# Allegro board PCIE TEST BOARD_V1.4.brd
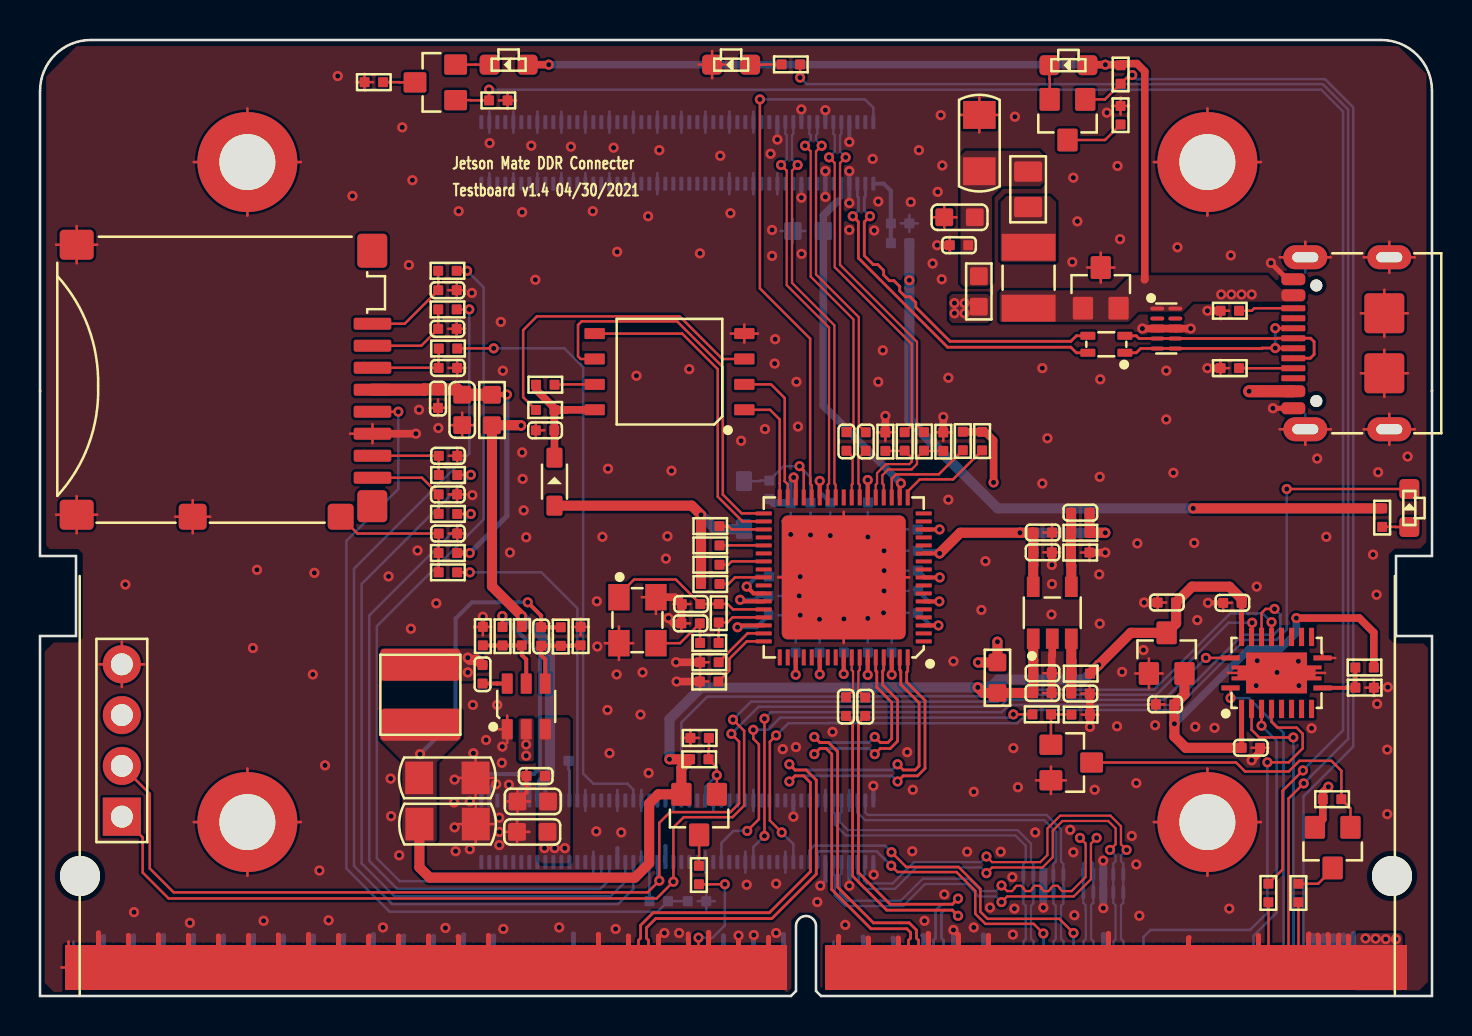
[diagram p0: board, top side]
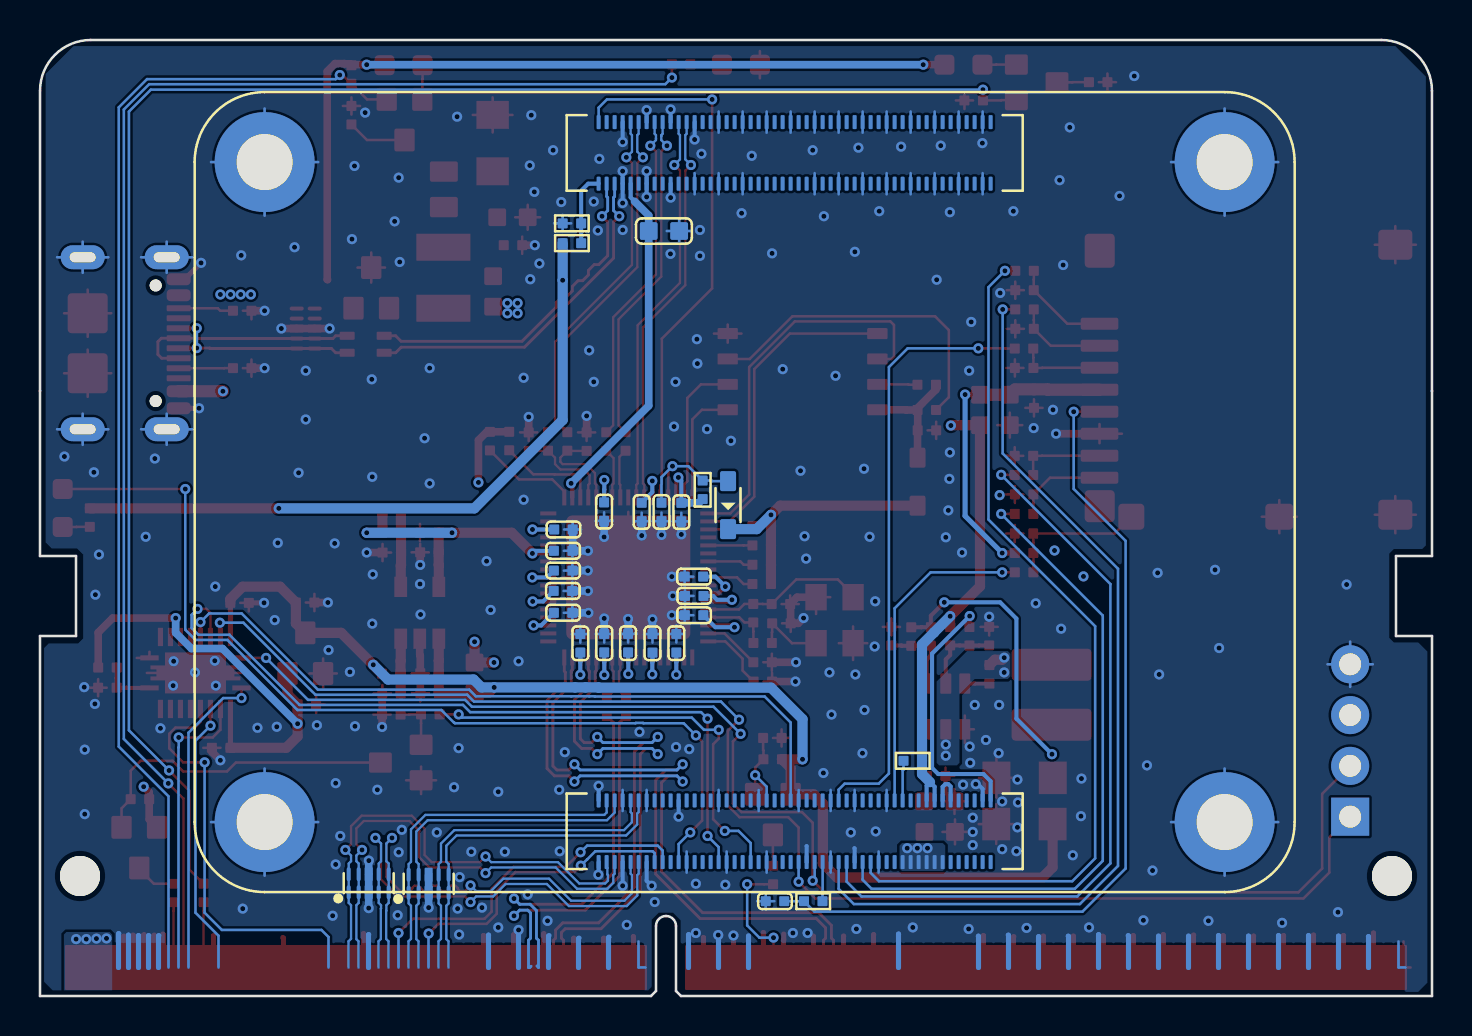
[diagram p1: board, bottom side, seen from below]

Outline 69.6 x 47.8 mm; copper layers: TOP, GND02, PWR03, BOTTOM. Coordinates in mm from the lower left corner of the outline.
Outline path: 0,30.25 0,30.25 0,45.26 arc(0.75,47.06) 2.54,47.8 67.06,47.8 arc(68.85,47.06) 69.6,45.26 69.6,30.25 69.6,30.25

## Design rules (mm)
constraint set DEFAULT: min track width 0.127
net group MDI0: nets ETH1_MDIN0 ETH1_MDIP0
net group MDI1: nets ETH1_MDIN1 ETH1_MDIP1
net group MDI2: nets ETH1_MDIN2 ETH1_MDIP2
net group MDI3: nets ETH1_MDIN3 ETH1_MDIP3
net group OTG: nets OTG_DN OTG_DP
net group PCIE_CLK: nets PCIE_CLK_N PCIE_CLK_P
net group PCIE_CLK1: nets PCIE_CLK_N1 PCIE_CLK_P1
net group PCIE_RX: nets PCIE_RX_N PCIE_RX_P
net group PCIE_TX: nets PCIE_TX_N PCIE_TX_P
net group PEXTX: nets PEXTX+ PEXTX-
net group SSTX2: nets SSTX2+ SSTX2-
net group USB: nets DN DP
net group USB2: nets USB2_DN USB2_DP
net group USB2_SSRX: nets USB2_SSRX_N USB2_SSRX_P
net group USB2_SSTX: nets USB2_SSTX_N USB2_SSTX_P

## Placement (name value [footprint] x y rotation side)
C10  10uF  [C0603]  24.61 8.2 180 top
C11  100nF  [C0402]  24.79 11 180 top
C12  10uF  [C0603]  24.64 9.73 180 top
C13  100nF  [C0402]  22.13 16.09 90 top
C14  22uF  [C1206]  20.38 8.6 0 top
C15  22uF  [C1206]  20.37 10.91 0 top
C16  75pF  [C0402]  25.06 17.98 270 top
C21  10pF  [C0402]  20.37 35.29 0 top
C22  10pF  [C0402]  20.4 23.12 0 top
C23  10pF  [C0402]  20.37 33.36 0 top
C24  10pF  [C0402]  20.39 31.4 0 top
C25  10pF  [C0402]  32.85 4.74 0 bottom
C26  10pF  [C0402]  20.4 27.01 0 top
C27  10pF  [C0402]  20.39 25.08 0 top
C28  10uF  [C0603]  21.11 29.31 270 top
C29  100nF  [C0402]  19.9 29.87 270 top
C36  10uF  [C0603]  45.98 38.94 180 top
C37  100nF  [C0402]  45.95 37.54 180 top
C40  100nF  [C0402]  40.32 27.73 270 top
C41  100nF  [C0402]  41.29 27.73 270 top
C44  100nF  [C0402]  39.52 24.2 270 bottom
C47  100nF  [C0402]  50.12 16.14 0 top
C48  100nF  [C0402]  50.14 23.17 0 top
C49  1uF  [C0402]  50.12 15.15 0 top
C50  2.2nF  [C0402]  52.02 24.17 0 top
C51  4.7uF  [C0402]  50.13 22.18 0 top
C52  6.8pF  [C0402]  32.55 19.6 180 top
C53  6.8pF  [C0402]  32.53 18.63 180 top
C54  100nF  [C0402]  25.25 28.29 180 top
C61  100nF  [C0402]  36.9 20.97 0 bottom
C62  100nF  [C0402]  43.44 22.26 180 bottom
C63  100nF  [C0402]  43.44 21.27 180 bottom
C64  100nF  [C0402]  40.2 17.64 90 bottom
C65  100nF  [C0402]  43.45 19.16 180 bottom
C66  100nF  [C0402]  37.78 17.64 90 bottom
C67  100nF  [C0402]  41.39 17.64 90 bottom
C68  100nF  [C0402]  43.45 20.25 180 bottom
C69  100nF  [C0402]  36.9 19.04 0 bottom
C70  100nF  [C0402]  41.39 24.22 270 bottom
C71  100nF  [C0402]  37.53 24.2 270 bottom
C72  100nF  [C0402]  43.43 23.33 180 bottom
C73  100nF  [C0402]  36.89 20.01 0 bottom
C74  100nF  [C0402]  42.58 17.63 90 bottom
C75  100nF  [C0402]  38.98 17.63 90 bottom
C186  10uF  [C0603]  38.4 38.25 180 bottom
C189  100nF  [C0402]  40.3 14.47 270 top
C190  100nF  [C0402]  41.26 14.47 270 top
C207  1uF  [C0402]  38.52 24.2 270 bottom
C208  1uF  [C0402]  52.02 15.12 0 top
C248  100uF  [C1206]  46.97 42.65 90 top
C251  100nF  [C0402]  60.54 12.41 180 top
C252  100nF  [C0402]  59.62 19.66 0 top
C253  100nF  [C0402]  56.26 14.58 180 top
C254  100nF  [C0402]  56.34 19.68 180 top
D38  B0540WS-7  [SOD_323]  25.72 25.72 90 top
D39  B0540WS-7  [SOD_323]  35.2 24.54 270 bottom
D44  SM05-7  [SOT23]  53.04 35.41 0 top
F1  5A  [F1210]  49.43 35.92 270 top
FB1  120R  [L0603]  22.6 29.3 90 top
FB6  120R  [L0603]  47.87 15.92 90 top
FB16  100R  [L0805]  49.41 40.34 90 top
J4  TYPE-C 2.0  [USB2_0_TYPE_C]  62.72 32.64 180 top
J15  TF-114  [MICRO_SD_15X14_3X1_8MM]  16.61 24.82 90 top
J26  DDR4_GOLDEN_FINGER_0.5mm_260P  [MODULE260P_0D5_69_6X30X1_2MM]  1.42 0 0 top
J28  Header 1x4 2.54mm  [HEADER4P_2D54_DIP]  4.09 12.78 180 top
L3  4.7uH  [L4040]  19.02 15.06 270 top
L4  90R  [L2012]  53.32 32.59 180 top
LED8  Clear-Green  [LED0603_SIDE]  68.47 24.4 270 top
LED10  Yellow-White  [LED0603_SIDE]  51.42 46.54 0 top
LED11  Yellow-White  [LED0603_SIDE]  23.43 46.57 0 top
LED12  Yellow-White  [LED0603_SIDE]  34.56 46.57 0 top
Q7  CJ3407  [SOT23]  64.63 7.42 180 top
Q8  MMBT3904  [SOT23]  51.56 11.67 270 top
Q9  CJ3407  [SOT23]  51.37 43.82 180 top
Q10  CJ3407  [SOT23]  19.77 45.68 90 top
Q11  CJ3407  [SOT23]  32.96 9.07 180 top
R5  10K  [R0402]  24.09 17.99 270 top
R6  100K  [R0402]  26.04 17.97 270 top
R7  22K  [R0402]  27.03 17.99 90 top
R10  33R  [R0402]  20.37 36.26 180 top
R11  33R  [R0402]  20.39 21.18 180 top
R12  33R  [R0402]  20.37 34.33 180 top
R13  33R  [R0402]  20.4 32.38 180 top
R14  33R  [R0402]  30.94 4.74 0 bottom
R15  33R  [R0402]  20.4 26.05 180 top
R16  33R  [R0402]  20.4 24.11 180 top
R22  4.7k  [R0402]  52.02 23.16 0 top
R23  15K  [R0402]  52.01 22.17 0 top
R24  10K  [R0402]  47.1 27.74 270 top
R25  0R  [R0402]  33.47 17.65 0 top
R26  1M  [R0402]  33.94 19.14 270 top
R27  6.04K  [R0402]  33.47 16.69 180 top
R28  10K  [R0402]  25.26 29.3 180 top
R57  0R  [R0402]  25.96 11.76 180 bottom
R58  10K  [R0402]  25.26 30.57 0 top
R64  4.7k  [R0402]  33.46 15.72 180 top
R65  10K  [R0402]  46.14 27.75 270 top
R73  100K  [R0402]  20.39 22.15 180 top
R78  4.7k  [R0402]  43 37.64 180 bottom
R79  4.7k  [R0402]  43 38.63 0 bottom
R88  10K  [R0402]  36.47 25.31 270 bottom
R89  10K  [R0402]  52.04 16.12 180 top
R104  10K  [R0402]  23.13 17.99 270 top
R107  100K  [R0402]  22.14 17.99 90 top
R108  33R  [R0402]  43.23 27.73 270 top
R109  33R  [R0402]  44.2 27.73 270 top
R110  49.9R  [R0402]  42.27 27.72 90 top
R111  49.9R  [R0402]  45.16 27.72 90 top
R117  1K  [R0402]  67.11 23.92 270 top
R121  0  [R0402]  62.92 5.15 270 top
R122  100K  [R0402]  64.6 9.84 0 top
R123  10K  [R0402]  50.09 14.08 0 top
R124  100K  [R0402]  52.03 14.07 0 top
R125  4.7k  [R0402]  54.03 44.04 270 top
R126  4.7k  [R0402]  54.03 46.08 90 top
R128  4.7k  [R0402]  16.69 45.69 0 top
R129  4.7k  [R0402]  22.91 44.78 180 top
R130  4.7k  [R0402]  37.54 46.58 0 top
R131  0  [R0402]  61.42 5.15 270 top
R132  10K  [R0402]  66.23 16.42 180 top
R133  100K  [R0402]  66.23 15.42 0 top
R134  4.7k  [R0402]  32.95 6.05 270 top
R136  dnp  [R0402]  32.96 11.84 0 top
R137  100K  [R0402]  32.98 12.9 0 top
R140  10K  [R0402]  33.51 20.6 180 top
R141  10K  [R0402]  33.51 21.57 180 top
R142  10K  [R0402]  33.51 22.53 180 top
R143  10K  [R0402]  33.51 23.5 180 top
R144  0R  [R0603]  46.94 35.23 270 top
R145  5.1K  [R0402]  59.49 31.39 180 top
R146  5.1K  [R0402]  59.49 34.26 180 top
U2  TPS54302  [SOT23_6]  24.31 14.48 0 top
U3  Raspberry Pi CM4  [MODULE_CM4]  34.37 25.2 270 bottom
U7  VL805-Q6  [QFN68_0D4_8X8X0_9MM_CENTER]  40.19 20.93 180 top
U8  AP2127K-ADJTRG1  [SOT23-5]  50.61 19.16 0 top
U9  W25Q128FVSIG  [SOIC8_1D27_5_2X5_2X1_95MM]  31.47 31.22 90 top
U21  TPD4E05U06DQAR  [USON10_0D5_2D5X1X0D5MM]  50.17 5.61 180 bottom
U22  TPD4E05U06DQAR  [USON10_0D5_2D5X1X0D5MM]  53.16 5.64 180 bottom
U24  TPD4E05U06DQAR  [USON10_0D5_2D5X1X0D5MM]  56.31 33.38 270 top
U29  TXS0108ERGYR  [VQFN-20]  61.83 16.15 0 top
U30  XC6206P182MR  [SOT23]  56.33 17.14 0 top
X1  25MHz  [X4-SMD-3_2X2_5X1_0MM]  29.87 18.79 270 top

## Library data of the parts
C10-C16 C21-C29 C36 C37 C40 C41 C44 C47-C54 C61-C75 C186 C189 C190 C207 C208 C248 C251-C254 = CC
D38 D39 = D
D44 = DIODE TVS DUAL
F1 = Fuse
FB1 FB6 FB16 = FB
J4 = USB2.0_Type C_16+6P#1
J15 = MicroSD Card_10+4P
J26 = Module_PCIE_317_0000_2263
J28 = Header 1x4
L3 = L
L4 = CL
LED8 LED10-LED12 = Single LED
Q7 Q9-Q11 = PMOS_123
Q8 = NPN
R5-R7 R10-R16 R22-R28 R57 R58 R64 R65 R73 R78 R79 R88 R89 R104 R107-R111 R117 R121-R126 R128-R134 R136 R137 R140-R146 = R
U2 = TPS54302
U3 = Module_CM4
U7 = VL805-Q6
U8 = LDO_5P_FB
U9 = QSPI_8P
U21 U22 U24 = TPD4E02B04-Q1
U29 = TXS0108E
U30 = LDO_3P
X1 = XTAL_4P

## Footprints (pads in the part's own frame, mm; a bottom-side part is the same pattern mirrored in y, then rotated)
C0402
  rrect 0.5x0.5 smd: 1(-0.463,0) 2(0.463,0)
C0603
  rrect 0.889x0.889 smd: 1(-0.762,0) 2(0.762,0)
C1206
  rect 1.397x1.626 smd: 1(-1.41,0) 2(1.41,0)
F1210
  rect 1.35x2.7 smd: 1(-1.525,0) 2(1.525,0)
HEADER4P_2D54_DIP
  rect 1.905x1.905 hole 1.1: 1(0,3.81)
  round 1.905 hole 1.1: 2(0,1.27) 3(0,-1.27) 4(0,-3.81)
L0603
  rrect 0.889x0.889 smd: 1(-0.762,0) 2(0.762,0)
L0805
  rrect 1.016x1.397 smd: 1(-0.889,0) 2(0.889,0)
L2012
  rrect 0.75x0.4 smd: 1(-0.925,0.425) 2(0.925,0.425) 3(0.925,-0.425) 4(-0.925,-0.425)
L4040
  rrect 1.6x4 smd: 1(-1.5,0) 2(1.5,0)
LED0603_SIDE
  rrect 1x1 smd: 1(0.95,0) 2(-0.95,0)
MICRO_SD_15X14_3X1_8MM
  rrect 0.6x1.88 smd: 1(8.8,-0.01) 2(7.7,-0.01) 3(6.6,-0.01) 4(5.5,-0.01) 5(4.4,-0.01) 6(3.3,-0.01) 7(2.2,-0.01) 8(1.1,-0.01)
  rrect 1.3x1.3 smd: 9(-0.85,1.58)
  rrect 1.3x1.4 smd: 10(-0.85,8.98)
  rrect 1.7x1.5 smd: S1(12.45,0)
  rrect 1.6x1.5 smd: S2(-0.325,0)
  rrect 1.5x1.7 smd: S3(-0.75,14.78) S4(12.75,14.78)
MODULE260P_0D5_69_6X30X1_2MM
  round 2 hole 2 unplated: (0.575,6) (66.175,6)
  rrect 0.35x2.25 smd: 1(0,1.425) 2(0.25,1.425) 3(0.5,1.425) 4(0.75,1.425) 5(1,1.425) 6(1.25,1.425) 7(1.5,1.425) 8(1.75,1.425) 9(2,1.425) 10(2.25,1.425) 11(2.5,1.425) 12(2.75,1.425) 13(3,1.425) 14(3.25,1.425) 15(3.5,1.425) 16(3.75,1.425) 17(4,1.425) 18(4.25,1.425) 19(4.5,1.425) 20(4.75,1.425) 21(5,1.425) 22(5.25,1.425) 23(5.5,1.425) 24(5.75,1.425) 25(6,1.425) 26(6.25,1.425) 27(6.5,1.425) 28(6.75,1.425) 29(7,1.425) 30(7.25,1.425) 31(7.5,1.425) 32(7.75,1.425) 33(8,1.425) 34(8.25,1.425) 35(8.5,1.425) 36(8.75,1.425) 37(9,1.425) 38(9.25,1.425) 39(9.5,1.425) 40(9.75,1.425) 41(10,1.425) 42(10.25,1.425) 43(10.5,1.425) 44(10.75,1.425) 45(11,1.425) 46(11.25,1.425) 47(11.5,1.425) 48(11.75,1.425) 49(12,1.425) 50(12.25,1.425) 51(12.5,1.425) 52(12.75,1.425) 53(13,1.425) 54(13.25,1.425) 55(13.5,1.425) 56(13.75,1.425) 57(14,1.425) 58(14.25,1.425) 59(14.5,1.425) 60(14.75,1.425) 61(15,1.425) 62(15.25,1.425) 63(15.5,1.425) 64(15.75,1.425) 65(16,1.425) 66(16.25,1.425) 67(16.5,1.425) 68(16.75,1.425) 69(17,1.425) 70(17.25,1.425) 71(17.5,1.425) 72(17.75,1.425) 73(18,1.425) 74(18.25,1.425) 75(18.5,1.425) 76(18.75,1.425) 77(19,1.425) 78(19.25,1.425) 79(19.5,1.425) 80(19.75,1.425) 81(20,1.425) 82(20.25,1.425) 83(20.5,1.425) 84(20.75,1.425) 85(21,1.425) 86(21.25,1.425) 87(21.5,1.425) 88(21.75,1.425) 89(22,1.425) 90(22.25,1.425) 91(22.5,1.425) 92(22.75,1.425) 93(23,1.425) 94(23.25,1.425) 95(23.5,1.425) 96(23.75,1.425) 97(24,1.425) 98(24.25,1.425) 99(24.5,1.425) 100(24.75,1.425) 101(25,1.425) 102(25.25,1.425) 103(25.5,1.425) 104(25.75,1.425) 105(26,1.425) 106(26.25,1.425) 107(26.5,1.425) 108(26.75,1.425) 109(27,1.425) 110(27.25,1.425) 111(27.5,1.425) 112(27.75,1.425) 113(28,1.425) 114(28.25,1.425) 115(28.5,1.425) 116(28.75,1.425) 117(29,1.425) 118(29.25,1.425) 119(29.5,1.425) 120(29.75,1.425) 121(30,1.425) 122(30.25,1.425) 123(30.5,1.425) 124(30.75,1.425) 125(31,1.425) 126(31.25,1.425) 127(31.5,1.425) 128(31.75,1.425) 129(32,1.425) 130(32.25,1.425) 131(32.5,1.425) 132(32.75,1.425) 133(33,1.425) 134(33.25,1.425) 135(33.5,1.425) 136(33.75,1.425) 137(34,1.425) 138(34.25,1.425) 139(34.5,1.425) 140(34.75,1.425) 141(35,1.425) 142(35.25,1.425) 143(35.5,1.425) 144(35.75,1.425) 145(38,1.425) 146(38.25,1.425) 147(38.5,1.425) 148(38.75,1.425) 149(39,1.425) 150(39.25,1.425) 151(39.5,1.425) 152(39.75,1.425) 153(40,1.425) 154(40.25,1.425) 155(40.5,1.425) 156(40.75,1.425) 157(41,1.425) 158(41.25,1.425) 159(41.5,1.425) 160(41.75,1.425) 161(42,1.425) 162(42.25,1.425) 163(42.5,1.425) 164(42.75,1.425) 165(43,1.425) 166(43.25,1.425) 167(43.5,1.425) 168(43.75,1.425) 169(44,1.425) 170(44.25,1.425) 171(44.5,1.425) 172(44.75,1.425) 173(45,1.425) 174(45.25,1.425) 175(45.5,1.425) 176(45.75,1.425) 177(46,1.425) 178(46.25,1.425) 179(46.5,1.425) 180(46.75,1.425) 181(47,1.425) 182(47.25,1.425) 183(47.5,1.425) 184(47.75,1.425) 185(48,1.425) 186(48.25,1.425) 187(48.5,1.425) 188(48.75,1.425) 189(49,1.425) 190(49.25,1.425) 191(49.5,1.425) 192(49.75,1.425) 193(50,1.425) 194(50.25,1.425) 195(50.5,1.425) 196(50.75,1.425) 197(51,1.425) 198(51.25,1.425) 199(51.5,1.425) 200(51.75,1.425) 201(52,1.425) 202(52.25,1.425) 203(52.5,1.425) 204(52.75,1.425) 205(53,1.425) 206(53.25,1.425) 207(53.5,1.425) 208(53.75,1.425) 209(54,1.425) 210(54.25,1.425) 211(54.5,1.425) 212(54.75,1.425) 213(55,1.425) 214(55.25,1.425) 215(55.5,1.425) 216(55.75,1.425) 217(56,1.425) 218(56.25,1.425) 219(56.5,1.425) 220(56.75,1.425) 221(57,1.425) 222(57.25,1.425) 223(57.5,1.425) 224(57.75,1.425) 225(58,1.425) 226(58.25,1.425) 227(58.5,1.425) 228(58.75,1.425) 229(59,1.425) 230(59.25,1.425) 231(59.5,1.425) 232(59.75,1.425) 233(60,1.425) 234(60.25,1.425) 235(60.5,1.425) 236(60.75,1.425) 237(61,1.425) 238(61.25,1.425) 239(61.5,1.425) 240(61.75,1.425) 241(62,1.425) 242(62.25,1.425) 243(62.5,1.425) 244(62.75,1.425) 245(63,1.425) 246(63.25,1.425) 247(63.5,1.425) 248(63.75,1.425) 249(64,1.425) 250(64.25,1.425) 251(64.5,1.425) 252(64.75,1.425) 253(65,1.425) 254(65.25,1.425) 255(65.5,1.425) 256(65.75,1.425) 257(66,1.425) 258(66.25,1.425) 259(66.5,1.425) 260(66.75,1.425)
MODULE_CM4
  rrect 0.7x0.2 smd: 1(18.5,-7.3) 2(15.42,-7.3) 3(18.5,-6.9) 4(15.42,-6.9) 5(18.5,-6.5) 6(15.42,-6.5) 7(18.5,-6.1) 8(15.42,-6.1) 9(18.5,-5.7) 10(15.42,-5.7) 11(18.5,-5.3) 12(15.42,-5.3) 13(18.5,-4.9) 14(15.42,-4.9) 15(18.5,-4.5) 16(15.42,-4.5) 17(18.5,-4.1) 18(15.42,-4.1) 19(18.5,-3.7) 20(15.42,-3.7) 21(18.5,-3.3) 22(15.42,-3.3) 23(18.5,-2.9) 24(15.42,-2.9) 25(18.5,-2.5) 26(15.42,-2.5) 27(18.5,-2.1) 28(15.42,-2.1) 29(18.5,-1.7) 30(15.42,-1.7) 31(18.5,-1.3) 32(15.42,-1.3) 33(18.5,-0.9) 34(15.42,-0.9) 35(18.5,-0.5) 36(15.42,-0.5) 37(18.5,-0.1) 38(15.42,-0.1) 39(18.5,0.3) 40(15.42,0.3) 41(18.5,0.7) 42(15.42,0.7) 43(18.5,1.1) 44(15.42,1.1) 45(18.5,1.5) 46(15.42,1.5) 47(18.5,1.9) 48(15.42,1.9) 49(18.5,2.3) 50(15.42,2.3) 51(18.5,2.7) 52(15.42,2.7) 53(18.5,3.1) 54(15.42,3.1) 55(18.5,3.5) 56(15.42,3.5) 57(18.5,3.9) 58(15.42,3.9) 59(18.5,4.3) 60(15.42,4.3) 61(18.5,4.701) 62(15.42,4.701) 63(18.5,5.1) 64(15.42,5.1) 65(18.5,5.5) 66(15.42,5.5) 67(18.5,5.9) 68(15.42,5.9) 69(18.5,6.3) 70(15.42,6.3) 71(18.5,6.701) 72(15.42,6.701) 73(18.5,7.1) 74(15.42,7.1) 75(18.5,7.5) 76(15.42,7.5) 77(18.5,7.9) 78(15.42,7.9) 79(18.5,8.3) 80(15.42,8.3) 81(18.5,8.701) 82(15.42,8.701) 83(18.5,9.1) 84(15.42,9.1) 85(18.5,9.5) 86(15.42,9.5) 87(18.5,9.9) 88(15.42,9.9) 89(18.5,10.3) 90(15.42,10.3) 91(18.5,10.701) 92(15.42,10.701) 93(18.5,11.1) 94(15.42,11.1) 95(18.5,11.5) 96(15.42,11.5) 97(18.5,11.9) 98(15.42,11.9) 99(18.5,12.3) 100(15.42,12.3) 101(-15.42,-7.3) 102(-18.5,-7.3) 103(-15.42,-6.9) 104(-18.5,-6.9) 105(-15.42,-6.5) 106(-18.5,-6.5) 107(-15.42,-6.1) 108(-18.5,-6.1) 109(-15.42,-5.7) 110(-18.5,-5.7) 111(-15.42,-5.3) 112(-18.5,-5.3) 113(-15.42,-4.9) 114(-18.5,-4.9) 115(-15.42,-4.5) 116(-18.5,-4.5) 117(-15.42,-4.1) 118(-18.5,-4.1) 119(-15.42,-3.7) 120(-18.5,-3.7) 121(-15.42,-3.3) 122(-18.5,-3.3) 123(-15.42,-2.9) 124(-18.5,-2.9) 125(-15.42,-2.5) 126(-18.5,-2.5) 127(-15.42,-2.1) 128(-18.5,-2.1) 129(-15.42,-1.7) 130(-18.5,-1.7) 131(-15.42,-1.3) 132(-18.5,-1.3) 133(-15.42,-0.9) 134(-18.5,-0.9) 135(-15.42,-0.5) 136(-18.5,-0.5) 137(-15.42,-0.1) 138(-18.5,-0.1) 139(-15.42,0.3) 140(-18.5,0.3) 141(-15.42,0.7) 142(-18.5,0.7) 143(-15.42,1.1) 144(-18.5,1.1) 145(-15.42,1.5) 146(-18.5,1.5) 147(-15.42,1.9) 148(-18.5,1.9) 149(-15.42,2.3) 150(-18.5,2.3) 151(-15.42,2.7) 152(-18.5,2.7) 153(-15.42,3.1) 154(-18.5,3.1) 155(-15.42,3.5) 156(-18.5,3.5) 157(-15.42,3.9) 158(-18.5,3.9) 159(-15.42,4.3) 160(-18.5,4.3) 161(-15.42,4.701) 162(-18.5,4.701) 163(-15.42,5.1) 164(-18.5,5.1) 165(-15.42,5.5) 166(-18.5,5.5) 167(-15.42,5.9) 168(-18.5,5.9) 169(-15.42,6.3) 170(-18.5,6.3) 171(-15.42,6.701) 172(-18.5,6.701) 173(-15.42,7.1) 174(-18.5,7.1) 175(-15.42,7.5) 176(-18.5,7.5) 177(-15.42,7.9) 178(-18.5,7.9) 179(-15.42,8.3) 180(-18.5,8.3) 181(-15.42,8.701) 182(-18.5,8.701) 183(-15.42,9.1) 184(-18.5,9.1) 185(-15.42,9.5) 186(-18.5,9.5) 187(-15.42,9.9) 188(-18.5,9.9) 189(-15.42,10.3) 190(-18.5,10.3) 191(-15.42,10.701) 192(-18.5,10.701) 193(-15.42,11.1) 194(-18.5,11.1) 195(-15.42,11.5) 196(-18.5,11.5) 197(-15.42,11.9) 198(-18.5,11.9) 199(-15.42,12.3) 200(-18.5,12.3)
  round 5 hole 2.8: 201(-16.501,24) 202(16.501,24) 203(16.501,-24) 204(-16.501,-24)
QFN68_0D4_8X8X0_9MM_CENTER
  rect 0.8x0.2 smd: 1(-4,3.2) 2(-4,2.8) 3(-4,2.4) 4(-4,2) 5(-4,1.6) 6(-4,1.2) 7(-4,0.8) 8(-4,0.4) 9(-4,0) 10(-4,-0.4) 11(-4,-0.8) 12(-4,-1.2) 13(-4,-1.6) 14(-4,-2) 15(-4,-2.4) 16(-4,-2.8) 17(-4,-3.2) 35(4,-3.2) 36(4,-2.8) 37(4,-2.4) 38(4,-2) 39(4,-1.6) 40(4,-1.2) 41(4,-0.8) 42(4,-0.4) 43(4,0) 44(4,0.4) 45(4,0.8) 46(4,1.2) 47(4,1.6) 48(4,2) 49(4,2.4) 50(4,2.8) 51(4,3.2)
  rect 0.2x0.8 smd: 18(-3.2,-4) 19(-2.8,-4) 20(-2.4,-4) 21(-2,-4) 22(-1.6,-4) 23(-1.2,-4) 24(-0.8,-4) 25(-0.4,-4) 26(0,-4) 27(0.4,-4) 28(0.8,-4) 29(1.2,-4) 30(1.6,-4) 31(2,-4) 32(2.4,-4) 33(2.8,-4) 34(3.2,-4) 52(3.2,4) 53(2.8,4) 54(2.4,4) 55(2,4) 56(1.6,4) 57(1.2,4) 58(0.8,4) 59(0.4,4) 60(0,4) 61(-0.4,4) 62(-0.8,4) 63(-1.2,4) 64(-1.6,4) 65(-2,4) 66(-2.4,4) 67(-2.8,4) 68(-3.2,4)
  rrect 6.2x6.2 smd: 69(0,0)
R0402
  rrect 0.5x0.5 smd: 1(-0.463,0) 2(0.463,0)
R0603
  rrect 0.889x0.889 smd: 1(-0.762,0) 2(0.762,0)
SOD_323
  rrect 1x0.8 smd: 1(-1.2,0) 2(1.2,0)
SOIC8_1D27_5_2X5_2X1_95MM
  rrect 0.55x1.016 smd: 1(-1.905,-3.742) 2(-0.635,-3.742) 3(0.635,-3.742) 4(1.905,-3.742) 5(1.905,3.742) 6(0.635,3.742) 7(-0.635,3.742) 8(-1.905,3.742)
SOT23
  rrect 1.016x1.143 smd: 1(-0.889,-1.016) 2(0.889,-1.016) 3(0,1.016)
SOT23-5
  rect 0.635x1.016 smd: 1(-0.953,-1.295) 2(0,-1.295) 3(0.953,-1.295) 4(0.953,1.295) 5(-0.953,1.295)
SOT23_6
  rrect 0.55x1.016 smd: 1(-0.95,-1.143) 2(0,-1.143) 3(0.95,-1.143) 4(0.95,1.143) 5(0,1.143) 6(-0.95,1.143)
USB2_0_TYPE_C
  round 0.6 hole 0.6 unplated: (-1.1,2.89) (-1.1,-2.89)
  rrect 1.2x0.3 smd: A5(0.05,1.25) A6(0.05,0.25) A7(0.05,-0.25) A8(0.05,-1.25) B5(0.05,-1.75) B6(0.05,-0.75) B7(0.05,0.75) B8(0.05,1.75)
  rrect 1.2x0.6 smd: B1(0.05,-3.2) B4(0.05,-2.4) B9(0.05,2.4) B12(0.05,3.25)
  oval 2.2x1.2 hole 1.3x0.5: S1(-4.75,4.3) S2(-0.55,4.3) S3(-4.75,-4.3) S4(-0.55,-4.3)
  rrect 2x2 smd: S5(-4.5,1.5) S6(-4.5,-1.5)
USON10_0D5_2D5X1X0D5MM
  oval 0.2x0.7 smd: 1(-1,-0.45) 2(-0.5,-0.45) 4(0.5,-0.45) 5(1,-0.45) 6(1,0.45) 7(0.5,0.45) 9(-0.5,0.45) 10(-1,0.45)
  rrect 0.4x0.7 smd: 3(0,-0.45) 8(0,0.45)
VQFN-20
  rect 0.914x0.254 smd: 1(-2.3,-0.75) 10(2.3,-0.75) 11(2.3,0.75) 20(-2.3,0.75)
  rect 0.254x0.914 smd: 2(-1.75,-1.8) 3(-1.25,-1.8) 4(-0.75,-1.8) 5(-0.25,-1.8) 6(0.25,-1.8) 7(0.75,-1.8) 8(1.25,-1.8) 9(1.75,-1.8) 12(1.75,1.8) 13(1.25,1.8) 14(0.75,1.8) 15(0.25,1.8) 16(-0.25,1.8) 17(-0.75,1.8) 18(-1.25,1.8) 19(-1.75,1.8)
  custom 4.5x2.05 smd: 21(0,0)
X4-SMD-3_2X2_5X1_0MM
  rect 1.321x1.067 smd: 1(-1.15,-0.925) 2(1.15,-0.925) 3(1.15,0.925) 4(-1.15,0.925)

## Nets
1V8: C251.2 C253.1 R132.1 U29.2 U30.2
3V3_EN: R5.2 R104.2 R107.1 U2.5
3V3_FB: C16.2 R6.2 R7.1 U2.4
3V3_SW: C13.2 L3.1 U2.2
GND_POWER: C10.2 C11.2 C12.2 C14.2 C15.2 C21.2 C22.2 C23.2 C24.2 C25.2 C26.2 C27.2 C28.2 C29.2 C36.2 C37.2 C44.2 C47.2 C48.2 C49.2 C51.2 C52.2 C53.2 C54.2 C61.2 C62.2 C63.2 C64.2 C65.2 C66.2 C67.2 C68.2 C69.2 C70.2 C71.2 C72.2 C73.2 C74.2 C75.2 C186.2 C207.2 C208.2 C248.2 C251.1 C252.1 C253.2 C254.2 D44.3 J4.B1 J4.B12 J4.S1 J4.S2 J4.S3 J4.S4 J4.S5 J4.S6 J15.6(VSS) J15.10 J15.S3 J15.S4 J26.1 J26.2 J26.7 J26.8 J26.13 J26.14 J26.19 J26.20 J26.25 J26.26 J26.31 J26.32 J26.37 J26.38 J26.43 J26.44 J26.49 J26.50 J26.55 J26.56 J26.61 J26.62 J26.67 J26.68 J26.73 J26.74 J26.79 J26.80 J26.85 J26.86 J26.102 J26.107 J26.113 J26.119 J26.125 J26.129 J26.132 J26.135 J26.138 J26.141 J26.144 J26.146 J26.147 J26.152 J26.153 J26.158 J26.159 J26.164 J26.165 J26.170 J26.171 J26.176 J26.177 J26.200 J26.201 J26.217 J26.231 J26.241 J26.242 J26.243 J26.244 J26.245 J26.246 J26.247 J26.248 J26.249 J26.250 J28.4 LED12.2(C) Q8.2(EMITTER) R7.2 R23.2 R27.2 R64.2 R79.2 R107.2 R110.2 R111.2 R124.2 R125.1 R128.1 R129.1 R133.2 R137.1 R145.2 R146.2 U2.1 U3.1 U3.2 U3.7 U3.8 U3.13 U3.14 U3.22 U3.23 U3.32 U3.33 U3.42 U3.43 U3.52 U3.53 U3.59 U3.60 U3.65 U3.66 U3.71 U3.74 U3.98 U3.107 U3.108 U3.113 U3.114 U3.119 U3.120 U3.125 U3.126 U3.131 U3.132 U3.137 U3.138 U3.144 U3.150 U3.155 U3.156 U3.161 U3.162 U3.167 U3.168 U3.173 U3.174 U3.179 U3.180 U3.185 U3.186 U3.191 U3.192 U3.197 U3.198 U3.201 U3.202 U3.203 U3.204 U7.69 U8.2 U9.4 U21.3 U21.8 U22.3 U22.8 U24.3 U24.8 U29.11 U29.21 U30.1(VSS) X1.2 X1.4
VIN: D44.1 D44.2 F1.2 J4.B4 J4.B9 J26.251 J26.252 J26.253 J26.254 J26.255 J26.256 J26.257 J26.258 J26.259 J26.260 LED10.1 LED11.1 Q7.2(S) R122.1 R126.2 U24.1 U24.10(NC3)
CAM1_C_N: U3.127
CAM1_C_P: U3.129
CAM1_D0_N: U3.115
CAM1_D0_P: U3.117
CAM1_D1_N: U3.121
CAM1_D1_P: U3.123
CAM_GPIO: U3.97
CM4_1V8: U3.88 U3.90
CM4_3V3: FB1.1 R5.1 R57.2 R78.1 R117.1 U3.84 U3.86
DCDC_3V3: C14.1 C15.1 C16.1 C47.1 C49.1 C252.2 C254.1 FB6.1 L3.2 Q11.2(S) R6.1 R89.1 R136.1 U8.1 U29.19(VCCB) U30.3
DN: J4.A7 J4.B7 L4.4 U24.4 U24.7
DP: J4.A6 J4.B6 L4.1 U24.5 U24.6
DSI1_C_N: U3.187
DSI1_C_P: U3.189
DSI1_D0_N: U3.175
DSI1_D0_P: U3.177
DSI1_D1_N: U3.181
DSI1_D1_P: U3.183
ETH1_LEDG: J26.188 U3.15
ETH1_LEDY: J26.194 U3.17
ETH1_MDIN0: J26.184 U3.12 U21.5 U21.6
ETH1_MDIN1: J26.190 U3.6 U21.2 U21.9
ETH1_MDIN2: J26.196 U3.9 U22.5 U22.6
ETH1_MDIN3: J26.202 U3.5 U22.2 U22.9
ETH1_MDIP0: J26.186 U3.10 U21.4 U21.7
ETH1_MDIP1: J26.192 U3.4 U21.1 U21.10(NC3)
ETH1_MDIP2: J26.198 U3.11 U22.4 U22.7
ETH1_MDIP3: J26.204 U3.3 U22.1 U22.10(NC3)
FAN_PWM: J26.230 U29.4
FAN_TACH: J26.208 U29.5
FORCE_OFF: Q10.1 R129.2 R131.1
GPIO2: U3.58
GPIO3: U3.56
GPIO8: R123.1 U3.39
GPIO9: U3.40
GPIO10: Q11.1 R136.2 R137.2 U3.44
GPIO11: U3.38
GPIO12: U3.31 U29.17
GPIO14: J28.2 U3.55 U29.20
GPIO15: J28.1 U3.51 U29.18
GPIO17: U3.50 U29.16
GPIO_VREF: R57.1 U3.78
HDMI0_CEC: U3.151
HDMI0_CLK_N: U3.190
HDMI0_CLK_P: U3.188
HDMI0_D0_N: U3.184
HDMI0_D0_P: U3.182
HDMI0_D1_N: U3.178
HDMI0_D1_P: U3.176
HDMI0_D2_N: U3.172
HDMI0_D2_P: U3.170
HDMI0_HOTPLUG: U3.153
HDMI0_SCL: U3.200
HDMI0_SDA: U3.199
NEXTRST: R104.1 U3.100
NPIBOOT: U3.93
NPL_LED_PWR: U3.95
NUSB_5V: C36.1 C37.1 C248.1 FB16.2 R144.1
OTG_DN: L4.3 U3.103
OTG_DP: L4.2 U3.105
PCIE_1V05: C44.1 C48.1 C50.2 C51.1 C61.1 C62.1 C63.1 C64.1 C65.1 C66.1 C67.1 R22.2 U7.3 U7.9 U7.12 U7.29 U7.45 U7.54 U7.60 U7.63 U8.5
PCIE_3V3: C68.1 C69.1 C70.1 C71.1 C72.1 C73.1 C74.1 C75.1 D38.1 D39.2(C) FB6.2 R24.1 R65.1 R88.2 R140.2 R141.2 R142.2 R143.2 U7.6 U7.15 U7.23 U7.32 U7.46(VSUS33#46) U7.49 U7.57 U7.66
PCIE_CLK_N: R108.1 U3.112
PCIE_CLK_N1: R108.2 R110.1 U7.22
PCIE_CLK_NREQ: U3.102 U7.30
PCIE_CLK_P: R109.1 U3.110
PCIE_CLK_P1: R109.2 R111.1 U7.21
PCIE_NRET: C186.1 U3.109 U7.19
PCIE_RX_N: C40.1 U3.118
PCIE_RX_P: C41.1 U3.116
PCIE_SPI_CS: U7.34 U9.1
PCIE_SPI_SCK: U7.35 U9.6
PCIE_SPI_SI: U7.36 U9.5
PCIE_SPI_SO: U7.33 U9.2
PCIE_TX_N: U3.124 U7.28
PCIE_TX_P: U3.122 U7.27
PD_SENSE: U3.96
PEXTX+: C41.2 U7.24
PEXTX-: C40.2 U7.25
PI_NLED: LED8.2(C) U3.21
PONRST: C207.1 D39.1 R88.1 U7.31
PWR_BUTTON: J26.240 Q9.1 R126.1
RUN_PG: U3.92
SCL0: U3.80
SD_3V3: C28.1 C29.1 FB1.2 J15.4 R73.1
SD_CLK: R14.1 U3.57
SD_CMD: R13.1 U3.62
SD_DATA0: R15.1 U3.63
SD_DATA1: R16.1 U3.67
SD_DATA2: R10.1 U3.69
SD_DATA3: R12.1 U3.61
SD_DET: R11.1 U3.76
SDA0: U3.82
SSTX2+: C189.1 U7.61
SSTX2-: C190.1 U7.62
SYS_5V: C10.1 C11.1 C12.1 R144.2 U2.3(VIN) U3.77 U3.79 U3.81 U3.83 U3.85 U3.87
UART_RX: J26.238 U29.3
UART_TX: J26.236 U29.1
USB2_DN: J26.115 U7.68
USB2_DP: J26.117 U7.67
USB2_SSRX_N: J26.161 U7.65
USB2_SSRX_P: J26.163 U7.64
USB2_SSTX_N: C190.2 J26.166
USB2_SSTX_P: C189.2 J26.168
USB_OTG_ID: R78.2 R79.1 U3.101
USB_PWR_EN: Q7.3 R121.1
N27872549: C13.1 U2.6
N27880093: C21.1 J15.1 R10.2
N27880096: C23.1 J15.2 R12.2
N27880099: C24.1 J15.3 R13.2
N27880102: C25.1 J15.5 R14.2
N27880105: C26.1 J15.7 R15.2
N27880133: C27.1 J15.8 R16.2
N27891283: C50.1 R22.1 R23.1 U8.4
N27892354: R24.2 U7.18
N27895219: R25.2 R26.2 U7.48
N27895223: C53.1 R25.1 X1.3
N27895244: C52.1 R26.1 U7.47 X1.1
N27896889: R64.1 U7.51
N27897274: R27.1 U7.50
N27898219: C54.1 D38.2(C) R28.1 R58.1 U9.8
N27898300: R28.2 U9.3(W\P\_IO2)
N27898305: R58.2 U9.7
N27950522: U3.75
N27950541: U3.89
N27950544: U3.91
N27950865: U3.99
N27950890: U3.16
N27950893: U3.18
N27950942: U3.20
N27952307: U3.94
N27991348: R65.2 U7.20
N28012442: C22.1 J15.9 R11.2 R73.2
N28230884: C208.1 R89.2 U8.3(S\H\D\N\)
N28518633: F1.1 FB16.1
N28608956: LED8.1 R117.2
N28614795: J26.239 R121.2
N28615317: Q8.1 R123.2 R124.1
N28615583: Q7.1 Q8.3 R122.2
N28615708: Q9.3 R125.2
N28615957: LED10.2(C) Q9.2(S)
N28616528: LED11.2(C) Q10.2(S)
N28616546: Q10.3 R128.2
N28617165: J26.237 R130.2
N28617193: LED12.1 R130.1
N28617587: J26.233 R131.2
N28620955: R132.2 R133.1 U29.10
N28629429: J26.127 R134.2
N28633904: Q11.3 R134.1
N28644899: R140.1 U7.43
N28644900: R141.1 U7.41
N28644901: R142.1 U7.39
N28644902: R143.1 U7.37
N286502630: J4.A5 R145.1
N286502637: J4.B5 R146.1

Pads without a net: J4 A8 B8; J15 S1 S2; J26 3 4 5 6 9 10 11 12 15 16 17 18 21 22 23 24 27 28 29 30 33 34 35 36 39 40 41 42 45 46 47 48 51 52 53 54 57 58 59 60 63 64 65 66 69 70 71 72 75 76 77 78 81 82 83 84 87 88 89 90 91 92 93 94 95 96 97 98 99 100 101 103 104 105 106 108 109 110 111 112 114 116 118 120 121 122 123 124 126 128 130 131 133 134 136 137 139 140 142 143 145 148 149 150 151 154 155 156 157 160 162 167 169 172 173 174 175 178 179 180 181 182 183 185 187 189 191 193 195 197 199 203 205 206 207 209 210 211 212 213 214 215 216 218 219 220 221 222 223 224 225 226 227 228 229 232 234 235; J28 3; U3 19 24 25 26 27 28 29 30 34 35 36 37 41 45 46 47 48 49 54 64 68 70 72 73 104 106 111 128 130 133 134 135 136 139 140 141 142 143 145 146 147 148 149 152 154 157 158 159 160 163 164 165 166 169 171 193 194 195 196; U7 1 2 4 5 7 8 10 11 13 14 16 17 26 38 40 42 44 52 53 55 56 58 59; U24 2 9; U29 6 7 8 9 12 13 14 15

## Via types
v1: diameter 0.508, hole 0.254, TOP to BOTTOM, 380 vias

## Routing (per net, layer and track width the routed paths; a pad name or vN(x,y) marks a point on that pad's centre or on a via; arc(x,y) is an arc through that point)
1V8: length 23.5
  TOP w0.254: C251.2 60.08,12.91 60.08,12.92 U29.2
  TOP w0.381: v1(62.82,18.9) 65.97,18.9 66.69,18.17 R132.1
  TOP w0.508: C251.2 57.29,12.41 56.72,12.98 v1(56.72,13.61) C253.1 57.22,15.08 U30.2
  BOTTOM w0.381: v1(56.72,13.61) 60.48,17.37 62.03,17.37 62.82,18.16 v1(62.82,18.9)
3V3_EN: length 4
  TOP w0.203: R107.1 22.64,17.53 22.65,17.53 R104.2 23.61,17.53 23.61,17.53 R5.2 24.09,17.05 24.31,16.83 U2.5
3V3_FB: length 4
  TOP w0.203: R7.1 26.53,17.53 26.52,17.51 R6.2 25.54,17.51 25.54,17.52 C16.2 25.06,17.04 25.26,16.83 U2.4
3V3_SW: length 0.9
  TOP w0.508: C13.2 21.86,16.81 21.49,16.81 v1(21.39,16.92)
  vias: v1(21.39,16.18) v1(24.31,12.57) v1(24.31,12.01)
GND_POWER: length 617.6
  TOP w0.127: 23.9,11 C11.2 24.32,11.43 ; 66.19,28.34 J4.S1 ; J4.S1 67.47,27.56 ; J4.S1 67.47,29.12 ; J4.S1 68.74,28.34 ; 36.91,20.93 U7.69 ; U7.69 40.19,17.65 ; U7.69 43.46,20.93 ; U7.69 40.19,24.21 ; 44.59,38.94 C36.2 ; C36.2 45.21,38.32 ; C36.2 45.21,39.56 ; C36.2 45.84,38.94 ; 26.6,18.45 R7.2 ; R7.2 27.03,18.88 ; R7.2 27.46,18.45 ; R7.2 27.03,18.03 ; J4.S4 63.27,37.72 ; J4.S4 61.99,36.94 ; J4.S4 64.54,36.94 ; 4.09,15.46 J28.4 ; J28.4 4.09,17.72 ; J28.4 2.96,16.59 ; J28.4 5.22,16.59 ; J4.S5 68.39,31.14 ; J4.S5 67.22,29.96 ; J4.S5 67.22,32.32 ; J4.S5 66.04,31.14 ; 53.04,35.67 D44.3 ; D44.3 53.04,37.17 ; D44.3 53.72,36.42 ; D44.3 52.35,36.42 ; U9.4 35.22,33.57 ; U9.4 35.22,32.67 ; U9.4 34.53,33.12 ; U9.4 35.9,33.12 ; 16.23,45.27 R128.1 ; R128.1 16.23,46.12 ; R128.1 16.66,45.69 ; R128.1 15.8,45.69 ; 44.74,28.18 R111.2 ; R111.2 45.16,27.75 ; R111.2 45.59,28.18 ; 45.49,37.11 C37.2 45.49,37.97 ; 20.86,26.58 C26.2 ; C26.2 20.86,27.44 ; C26.2 20.44,27.01 ; C26.2 21.29,27.01 ; 59.03,33.84 R146.2 59.46,34.26 ; 42.27,27.75 R110.2 ; R110.2 41.84,28.18 ; R110.2 42.7,28.18 ; 20.43,23.12 C22.2 ; C22.2 20.86,22.7 ; C22.2 21.29,23.12 ; C22.2 20.86,23.55 ; 23.38,44.35 R129.1 ; R129.1 23.38,45.21 ; R129.1 23.81,44.78 ; R129.1 22.95,44.78 ; 20.41,33.36 C23.2 ; C23.2 20.83,33.79 ; C23.2 20.83,32.93 ; C23.2 21.26,33.36 ; 54.03,44.08 R125.1 ; R125.1 54.03,44.93 ; R125.1 53.6,44.5 ; R125.1 54.46,44.5 ; 59.4,16.15 U29.21 64.25,16.15 ; C12.2 23.87,10.35 ; C12.2 23.87,9.11 ; C12.2 23.25,9.73 ; C12.2 24.5,9.73 ; 50.6,22.75 C48.2 ; C48.2 50.6,23.6 ; C48.2 51.03,23.17 ; C48.2 50.17,23.17 ; 59.03,30.97 R145.2 ; R145.2 59.03,31.82 ; R145.2 59.46,31.39 ; C254.2 56.31,19.68 ; C254.2 55.88,20.1 ; C254.2 55.88,19.25 ; 50.55,10.1 Q8.2 ; Q8.2 49.8,10.78 ; Q8.2 51.3,10.78 ; Q8.2 50.55,11.47 ; J4.S3 68.74,36.94 ; J4.S3 67.47,37.72 ; J4.S3 66.19,36.94 ; J4.S3 67.47,36.16 ; 20.86,24.65 C27.2 ; C27.2 20.43,25.08 ; C27.2 21.28,25.08 ; C27.2 20.86,25.51 ; LED12.2 34.28,46.57 ; LED12.2 32.93,46.57 ; LED12.2 33.61,47.25 ; LED12.2 33.61,45.89 ; 22.14,18.03 R107.2 ; R107.2 22.57,18.46 ; R107.2 21.71,18.46 ; C248.2 47.96,44.06 ; C248.2 46.97,44.93 ; C248.2 45.98,44.06 ; C248.2 46.97,43.18 ; 7.69,41.7 U3.201 ; U3.201 10.37,39.02 ; U3.201 10.37,44.38 ; U3.201 13.05,41.7 ; R133.2 66.69,15.85 ; R133.2 66.27,15.42 ; R133.2 66.69,14.99 ; R133.2 67.12,15.42 ; 50.58,14.72 C49.2 ; C49.2 51.01,15.15 ; C49.2 50.15,15.15 ; R124.2 52.92,14.07 ; R124.2 52.07,14.07 ; R124.2 52.5,14.5 ; C54.2 24.79,28.71 ; C54.2 25.22,28.29 ; C54.2 24.79,27.86 ; C10.2 24.47,8.2 ; C10.2 23.23,8.2 ; C10.2 23.85,7.58 ; C10.2 23.85,8.83 ; 28.95,16.8 X1.2 ; X1.2 28.24,17.64 ; X1.2 28.95,18.48 ; X1.2 29.66,17.64 ; U3.203 58.37,11.37 ; U3.203 58.37,6.02 ; U3.203 61.05,8.7 ; U3.203 55.69,8.7 ; J15.S4 1.83,38.49 ; J15.S4 0.81,37.57 ; J15.S4 1.83,36.64 ; J15.S4 2.86,37.57 ; U3.204 58.37,44.38 ; U3.204 58.37,39.02 ; U3.204 61.05,41.7 ; U3.204 55.69,41.7 ; R27.2 33.01,17.12 ; R27.2 33.44,16.69 ; R27.2 33.01,16.26 ; R64.2 33,16.15 ; R64.2 33,15.29 ; R64.2 33.43,15.72 ; 7.69,8.7 U3.202 ; U3.202 13.05,8.7 ; U3.202 10.37,11.37 ; U3.202 10.37,6.02 ; C29.2 20.33,29.41 ; C29.2 19.9,28.98 ; C29.2 19.9,29.84 ; C29.2 19.47,29.41 ; 23.36,12.65 U2.1 ; U2.1 22.91,13.34 ; U2.1 23.36,14.02 ; C28.2 21.11,29.17 ; C28.2 20.49,28.55 ; C28.2 21.73,28.55 ; C28.2 21.11,27.92 ; J15.6 16.62,28.59 ; J15.6 15.51,28.12 ; J15.6 16.62,27.64 ; 32.09,12.9 R137.1 ; R137.1 32.52,12.47 ; R137.1 32.52,13.33 ; R137.1 32.95,12.9 ; C15.2 21.78,11.9 ; C15.2 20.9,10.91 ; C15.2 22.66,10.91 ; C15.2 21.78,9.92 ; 55.44,15.38 U30.1 ; U30.1 54.76,16.13 ; U30.1 56.13,16.13 ; U30.1 55.44,16.88 ; 30.8,19.1 X1.4 30.09,19.94 ; 7.63,23.14 J15.10 ; J15.10 7.63,24.79 ; J15.10 8.51,23.97 ; J15.10 6.76,23.97 ; C24.2 20.86,31.83 ; C24.2 20.86,30.98 ; C24.2 21.28,31.4 ; C24.2 20.43,31.4 ; 20.91,8.6 C14.2 ; C14.2 21.79,7.6 ; C14.2 22.67,8.6 ; C14.2 21.79,9.59 ; 50.59,15.71 C47.2 ; C47.2 51.01,16.14 ; C47.2 50.16,16.14 ; J4.S6 68.39,34.14 ; J4.S6 66.04,34.14 ; J4.S6 67.22,35.32 ; J4.S6 67.22,32.96 ; 50.16,22.18 C51.2 ; C51.2 50.59,22.61 ; C51.2 51.02,22.18 ; C52.2 32.09,20.03 ; C52.2 32.09,19.17 ; C52.2 32.52,19.6 ; C52.2 31.66,19.6 ; C21.2 21.26,35.29 ; C21.2 20.41,35.29 ; C21.2 20.84,35.72 ; C21.2 20.84,34.86 ; 0.81,24.07 J15.S3 ; J15.S3 1.83,24.99 ; J15.S3 2.86,24.07 ; J15.S3 1.83,23.14 ; C208.2 52.92,15.12 ; C208.2 52.06,15.12 ; C208.2 52.49,15.55 ; 59.16,19.23 C252.1 59.59,19.66 ; 64.76,16.9 U29.11 64.13,17.21 ; R23.2 52.47,22.6 ; R23.2 52.47,21.74 ; R23.2 52.04,22.17 ; C253.2 56.22,14.58 ; C253.2 55.37,14.58 ; C253.2 55.79,14.15 ; C253.2 55.79,15.01 ; 1.07,1.42 J26.1 1.42,2.73 ; 61.43,12.41 C251.1 60.58,12.41 ; 63.27,27.56 J4.S2 ; J4.S2 61.99,28.34 ; J4.S2 64.54,28.34 ; 32.07,18.21 C53.2 32.5,18.63
  TOP w0.203: R107.2 v1(22.14,18.96) ; C11.2 24.32,10.18 C12.2 ; v1(61.85,16.18) U29.21
  TOP w0.254: 4.42,3.02 4.42,3.02 J26.13 ; 64.95,3.05 64.92,3.02 J26.247 ; 16.46,3 16.42,2.96 J26.61 ; J26.147 39.92,2.97 39.93,2.97 ; J26.119 30.93,2.98 30.94,3 ; 19.43,3 19.42,2.99 J26.73 ; 60.91,3.02 60.92,3.01 J26.231 ; 44.4,3.12 44.42,3.1 J26.165 ; J26.159 42.92,2.87 42.9,2.9 ; J26.49 13.42,3.06 13.44,3.07 ; J26.201 53.42,3.12 53.42,3.12 ; J26.107 27.93,3.07 27.92,3.07 ; 36.42,2.92 J26.141 ; C252.1 58.4,19.66 v1(58.4,19.66) ; J26.135 34.93,3.02 v1(34.93,3.02) ; 2.92,3.15 2.93,3.15 J26.7 ; 14.94,3.02 14.93,3.01 J26.55 ; J26.113 29.42,2.99 29.42,3 ; 63.88,3.05 63.92,3.01 J26.243 ; v1(61.55,36.66) 62.37,35.84 J4.B1 ; J26.241 63.42,3.07 63.45,3.1 ; 57.46,2.92 57.42,2.89 J26.217 ; J26.85 22.42,3.02 22.43,3.02 ; J26.171 45.92,3.05 v1(45.67,3.3) ; J26.129 33.42,2.8 33.43,2.81 33.43,3.17 33.43,3.18 ; J26.25 7.42,3.02 7.42,3.02 ; 10.44,3.02 10.42,3.01 J26.37 ; J26.249 65.43,2.98 65.41,3 ; 20.91,2.97 20.93,2.95 J26.79 ; 17.93,3 17.93,2.99 J26.67 ; 41.4,2.9 41.42,2.88 J26.153 ; J26.43 11.93,3.04 11.92,3.05 ; 64.39,3.07 64.42,3.04 J26.245 ; 8.92,3 8.93,2.99 J26.31 ; 32.41,3.1 32.41,2.82 32.42,2.8 J26.125 ; 47.42,3.02 47.42,3.02 J26.177 ; J4.B12 v1(61.65,29.39) ; J26.19 5.93,3.04 5.92,3.05
  TOP w0.381: C254.2 v1(55.21,19.68) ; R146.2 v1(58.37,34.26) ; C251.1 61,12.21 v1(60.58,11.79) ; J15.6 v1(18.8,28.12) ; R64.2 v1(31.83,15.72) ; C49.2 50.58,16.13 C47.2 50.59,17.01 50.61,17.04 U8.2 ; R27.2 v1(31.8,16.69) ; R145.2 v1(58.37,31.39) ; C37.2 v1(44.86,37.54) ; C51.2 v1(50.59,21.56) ; v1(55.12,33.38) U24.3 U24.8 v1(57.53,33.38) ; R23.2 v1(53.27,22.17) ; v1(31.42,18.9) 31.69,18.63 C53.2 32.07,19.57 C52.2 31.75,19.94 X1.4 ; v1(52.5,13.45) R124.2 52.49,14.08 C208.2 ; R111.2 v1(45.16,28.96) ; R110.2 v1(42.27,29.01)
  GND02 w0.127: J4.S4 64.54,36.94 ; J4.S4 61.99,36.94 ; J4.S4 63.27,37.72 ; J4.S4 63.27,36.16 ; 4.09,15.46 J28.4 ; J28.4 5.22,16.59 ; J28.4 2.96,16.59 ; J28.4 4.09,17.72 ; 58.37,6.02 U3.203 ; U3.203 61.05,8.7 ; U3.203 58.37,11.37 ; U3.203 55.69,8.7 ; U3.201 10.37,44.38 ; U3.201 13.05,41.7 ; U3.201 10.37,39.02 ; U3.201 7.69,41.7 ; U3.202 13.05,8.7 ; U3.202 7.69,8.7 ; U3.202 10.37,6.02 ; U3.202 10.37,11.37 ; U3.204 61.05,41.7 ; U3.204 58.37,44.38 ; U3.204 58.37,39.02 ; U3.204 55.69,41.7 ; J4.S1 67.47,29.12 ; J4.S1 68.74,28.34 ; J4.S1 66.19,28.34 ; J4.S1 67.47,27.56 ; 61.99,28.34 J4.S2 ; J4.S2 63.27,29.12 ; J4.S2 63.27,27.56 ; J4.S2 64.54,28.34 ; 67.47,36.16 J4.S3 ; J4.S3 68.74,36.94 ; J4.S3 66.19,36.94 ; J4.S3 67.47,37.72
  PWR03 w0.127: U3.202 10.37,11.37 ; U3.202 7.69,8.7 ; U3.202 13.05,8.7 ; U3.202 10.37,6.02 ; J4.S2 64.54,28.34 ; J4.S2 63.27,27.56 ; J4.S2 61.99,28.34 ; J4.S2 63.27,29.12 ; J4.S4 63.27,37.72 ; J4.S4 61.99,36.94 ; J4.S4 63.27,36.16 ; J4.S4 64.54,36.94 ; U3.204 58.37,44.38 ; U3.204 58.37,39.02 ; U3.204 61.05,41.7 ; U3.204 55.69,41.7 ; 55.69,8.7 U3.203 ; U3.203 58.37,11.37 ; U3.203 61.05,8.7 ; U3.203 58.37,6.02 ; J4.S3 68.74,36.94 ; J4.S3 67.47,37.72 ; J4.S3 66.19,36.94 ; J4.S3 67.47,36.16 ; J28.4 5.22,16.59 ; J28.4 2.96,16.59 ; J28.4 4.09,17.72 ; J28.4 4.09,15.46 ; U3.201 10.37,44.38 ; U3.201 7.69,41.7 ; U3.201 13.05,41.7 ; U3.201 10.37,39.02 ; 67.47,27.56 J4.S1 ; J4.S1 68.74,28.34 ; J4.S1 66.19,28.34 ; J4.S1 67.47,29.12
  BOTTOM w0.127: 26.07,43.17 U3.180 26.07,44.22 ; 22.47,41.15 U3.197 22.47,40.09 ; 33.27,7.23 U3.43 33.27,6.17 ; 40.96,18.1 C67.2 ; C67.2 41.39,17.68 ; C67.2 41.82,18.1 ; 27.27,44.22 U3.174 27.27,43.17 ; 23.67,44.22 U3.192 23.67,43.17 ; U3.202 10.37,11.37 ; U3.202 13.05,8.7 ; U3.202 10.37,6.02 ; U3.202 7.69,8.7 ; 35.67,10.31 U3.32 35.67,9.25 ; R79.2 43.47,39.06 ; R79.2 43.47,38.2 ; R79.2 43.9,38.63 ; R79.2 43.04,38.63 ; 24.87,40.09 U3.185 24.87,41.15 ; 4.09,15.46 J28.4 ; J28.4 5.22,16.59 ; J28.4 2.96,16.59 ; J28.4 4.09,17.72 ; 28.47,41.15 U3.167 28.47,40.09 ; 24.87,44.22 U3.186 24.87,43.17 ; 30.07,7.23 U3.59 30.07,6.17 ; 63.27,36.16 J4.S4 ; J4.S4 61.99,36.94 ; J4.S4 64.54,36.94 ; J4.S4 63.27,37.72 ; C74.2 43.01,18.1 ; C74.2 42.58,17.67 ; C74.2 42.15,18.1 ; C74.2 42.58,18.53 ; 22.47,44.22 U3.198 22.47,43.17 ; 35.67,44.22 U3.132 35.67,43.17 ; 42.98,20.84 C63.2 ; C63.2 42.98,21.7 ; C63.2 43.41,21.27 ; 36.87,41.15 U3.125 36.87,40.09 ; C72.2 42.96,23.76 ; C72.2 42.54,23.33 ; C72.2 43.39,23.33 ; 30.87,40.09 U3.155 30.87,41.15 ; 33.67,9.25 U3.42 33.67,10.31 ; 38.1,23.74 C207.2 ; C207.2 38.52,24.17 ; C207.2 38.95,23.74 ; J4.S1 68.74,28.34 ; J4.S1 67.47,27.56 ; J4.S1 67.47,29.12 ; J4.S1 66.19,28.34 ; 30.07,10.31 U3.60 30.07,9.25 ; 29.67,44.22 U3.162 29.67,43.17 ; 37.35,18.1 C66.2 ; C66.2 38.21,18.1 ; C66.2 37.78,17.68 ; C66.2 37.78,18.53 ; C65.2 43.41,19.16 ; C65.2 42.98,19.59 ; C65.2 42.98,18.73 ; U3.203 58.37,11.37 ; U3.203 58.37,6.02 ; U3.203 55.69,8.7 ; U3.203 61.05,8.7 ; C61.2 37.37,21.4 ; C61.2 36.94,20.97 ; C61.2 37.37,20.54 ; 39.32,1.42 J26.146 39.68,2.73 ; C71.2 37.53,24.16 ; C71.2 37.96,23.73 ; C71.2 37.11,23.73 ; C70.2 41.82,23.76 ; C70.2 41.39,24.19 ; C70.2 40.97,23.76 ; J4.S3 67.47,37.72 ; J4.S3 66.19,36.94 ; J4.S3 67.47,36.16 ; J4.S3 68.74,36.94 ; 28.47,43.17 U3.168 28.47,44.22 ; 27.27,9.25 U3.74 27.27,10.31 ; C44.2 39.94,23.74 ; C44.2 39.52,24.17 ; C44.2 39.09,23.74 ; J4.S2 63.27,29.12 ; J4.S2 63.27,27.56 ; J4.S2 64.54,28.34 ; J4.S2 61.99,28.34 ; 28.87,9.25 U3.66 28.87,10.31 ; 33.27,44.22 U3.144 33.27,43.17 ; 27.67,6.17 U3.71 27.67,7.23 ; 26.07,40.09 U3.179 26.07,41.15 ; 30.87,44.22 U3.156 30.87,43.17 ; 37.36,18.61 C69.2 ; C69.2 37.36,19.47 ; C69.2 36.93,19.04 ; C68.2 43.42,20.25 ; C68.2 42.99,20.68 ; C68.2 42.99,19.83 ; 32.07,43.17 U3.150 32.07,44.22 ; 40.47,10.31 U3.8 40.47,9.25 ; 34.47,40.09 U3.137 34.47,41.15 ; 23.67,40.09 U3.191 23.67,41.15 ; U3.204 58.37,44.38 ; U3.204 55.69,41.7 ; U3.204 58.37,39.02 ; U3.204 61.05,41.7 ; U3.201 10.37,44.38 ; U3.201 7.69,41.7 ; U3.201 13.05,41.7 ; U3.201 10.37,39.02 ; 37.27,7.23 U3.23 37.27,6.17 ; 31.67,9.25 U3.52 31.67,10.31 ; 42.98,21.83 C62.2 ; C62.2 42.98,22.69 ; C62.2 43.41,22.26 ; C186.2 38.26,38.25 ; C186.2 37.64,37.63 ; C186.2 37.02,38.25 ; C186.2 37.64,38.87 ; 38.55,18.1 C75.2 ; C75.2 38.98,17.67 ; C75.2 39.4,18.1 ; 39.27,10.31 U3.14 39.27,9.25 ; 27.27,41.15 U3.173 27.27,40.09 ; 1.67,2.73 J26.2 1.32,1.42 ; C64.2 40.62,18.11 ; C64.2 39.77,18.11 ; C64.2 40.2,17.68 ; 29.67,41.15 U3.161 29.67,40.09 ; 35.67,41.15 U3.131 35.67,40.09 ; 36.92,20.01 C73.2 ; C73.2 37.35,20.43 ; C73.2 37.35,19.58 ; C25.2 33.74,4.74 ; C25.2 33.31,4.31 ; C25.2 32.88,4.74 ; C25.2 33.31,5.17 ; 35.27,7.23 U3.33 35.27,6.17 ; 34.47,44.22 U3.138 34.47,43.17
  BOTTOM w0.203: U3.120 v1(38.07,44.33) ; U3.98 22.47,10.36 22.7,10.59 v1(22.81,10.59) ; U3.7 v1(40.47,5.51) ; U3.108 v1(40.47,42.7) ; U3.1 41.67,6.08 v1(41.68,6.07) ; U3.2 v1(41.67,10.51) ; U3.13 39.27,5.76 v1(39.02,5.51) ; v1(36.87,42.82) 36.87,42.99 36.87,42.99 U3.126 ; U3.114 v1(39.27,44.3) ; U3.65 28.87,7.38 28.88,7.39 ; v1(39.27,41.25) U3.113 v1(39.27,39.96) ; v1(37.67,8.97) 37.67,8.97 U3.22 ; v1(40.47,39.65) U3.107 v1(40.47,41.25) ; U3.53 31.27,7.49 31.27,7.49 ; U3.119 v1(38.07,39.92)
  BOTTOM w0.254: J26.74 19.67,2.96 19.66,2.97 ; J26.242 63.68,3 63.65,3.02 ; 18.19,3 18.17,2.98 J26.68 ; J26.246 64.68,3.02 64.67,3.02 ; J26.132 34.17,3.01 ; J26.176 47.17,3.04 47.17,3.05 ; 65.66,3.12 65.68,3.11 J26.250 ; 22.68,3 22.67,2.99 J26.86 ; J26.80 21.17,3.04 21.19,3.05 ; J26.200 53.17,3.06 53.16,3.07 ; 26.67,3.1 26.67,3.1 J26.102 ; 42.65,2.9 42.68,2.87 J26.158 ; J26.26 7.67,3.02 7.67,3.02 ; 41.15,2.95 41.17,2.92 J26.152 ; 13.67,3 13.67,2.99 J26.50 ; J26.170 45.68,3.3 v1(45.67,3.3) ; 9.17,3 9.17,2.99 J26.32 ; 64.16,3.02 64.17,3.01 J26.244 ; J26.38 10.67,3.02 10.67,3.02 ; J26.144 37.17,3.06 37.16,3.07 ; J26.138 35.68,3.03 v1(35.69,3.05) ; 4.67,3 J26.14 ; 65.18,3.05 65.17,3.04 J26.248 ; 44.15,3.02 44.17,3 J26.164 ; J26.62 16.67,3.06 16.66,3.07 ; J26.44 12.17,2.99 12.17,3 ; J26.8 3.18,2.97 3.18,2.97 ; 6.17,3.02 6.17,3.02 J26.20 ; 15.19,3.02 15.17,3.01 J26.56
  BOTTOM w0.381: C72.2 42.96,22.28 C62.2 v1(42.2,22.26) ; C63.2 v1(42.21,21.27) ; v1(53.16,6.77) 53.16,6.76 U22.8 U22.3 v1(53.16,4.39) ; C68.2 v1(42.2,20.25) ; C70.2 v1(41.39,22.95) ; v1(50.17,4.42) U21.3 U21.8 ; C44.2 v1(39.52,23.02) ; C207.2 v1(38.52,23.05) ; C71.2 v1(37.53,23.08) ; C64.2 v1(40.2,18.86) ; C73.2 v1(37.96,20.01) ; C75.2 v1(38.98,18.84) ; C69.2 v1(38.01,19.04) ; C67.2 v1(41.39,18.88) ; C61.2 v1(38.01,20.97) ; C65.2 v1(42.18,19.16)
  vias: v1(4.27,20.57) v1(4.7,4.19) v1(7.5,3.66) v1(10.65,17.4) v1(10.85,21.31) v1(11.18,3.76) v1(13.64,16.08) v1(13.72,21.16) v1(13.97,6.27) v1(14.25,11.53) v1(14.43,3.78) v1(14.89,46) v1(15.62,40.01) v1(17.15,3.43) v1(17.43,20.98) v1(17.53,10.87) v1(17.55,8.99) v1(17.96,7.04) v1(18.11,43.43) v1(18.44,36.55) v1(18.54,18.36) v1(18.62,40.79) v1(18.87,22.28) v1(18.95,29.31) v1(19.81,19.63) v1(19.92,28.4) v1(20.27,3.4) v1(20.7,9.68) v1(20.73,10.82) v1(20.73,8.43) v1(20.78,7.24) v1(20.93,39.24) v1(21.49,9.73) v1(21.49,7.34) v1(21.59,35.15) v1(21.62,25.04) v1(21.64,14.55) v1(21.67,12.14) v1(22.3,12.8) v1(22.48,42.65) v1(22.86,14.55) v1(22.96,8.92) v1(22.96,8.2) v1(22.96,7.54) v1(23.04,33.71) v1(23.09,11.66) v1(23.14,31.27) v1(23.12,12.47) v1(23.17,3.35) v1(23.5,22.17) v1(23.45,10.57) v1(24.11,39.19) v1(24.11,27.18) v1(24.13,25.86) v1(24.18,24.28) v1(24.31,22.94) v1(24.56,42.52) v1(24.77,35.81) v1(25.96,3.43) v1(26.55,42.47) v1(27.64,39.24) v1(27.84,19.74) v1(27.87,17.48) v1(27.82,8.23) v1(28.12,22.96) v1(28.4,26.37) v1(28.37,14.3) v1(28.48,12.14) v1(28.68,42.42) v1(28.78,3.35) v1(28.86,37.21) v1(28.83,16.08) v1(29.06,8.18) v1(29.82,31.01) v1(30.03,14.07) v1(30.13,16.18) v1(30.41,38.99) v1(30.43,11.15) v1(30.97,42.29) v1(31.3,21.87) v1(31.22,3.15) v1(31.37,22.99) v1(31.57,26.26) v1(31.96,3.15) v1(32.46,31.34) v1(33,37.13) v1(34.01,42.01) v1(34.52,39.14) v1(35.05,27.76) v1(35.33,5.56) v1(36.25,28.35) v1(36.53,42.11) v1(36.6,38.3) v1(36.6,37.01) v1(36.76,32.84) v1(36.73,31.62) v1(36.81,5.61) v1(36.81,3.15) v1(37.14,12.34) v1(37.8,12.45) v1(37.82,30.71) v1(37.9,28.47) v1(38.08,37.11) v1(38.86,4.7) v1(39.63,13.21) v1(40.26,3.56) v1(40.46,38.3) v1(41.63,41.86) v1(41.71,38.28) v1(41.91,39.73) v1(41.91,30.71) v1(42.14,32.28) v1(43.36,12.19) v1(43.54,39.7) v1(43.64,10.31) v1(43.61,7.24) v1(43.94,42.29) v1(44.22,3.76) v1(44.63,36.63) v1(44.88,40.21) v1(45.04,44.04) v1(45.09,35.84) v1(45.11,41.53) v1(45.21,5.08) v1(45.42,30.91) v1(45.42,24.82) v1(45.67,16.74) v1(46.36,7.21) v1(46.69,10.21) v1(46.69,3.43) v1(47.07,19.3) v1(47.27,21.74) v1(47.5,4.42) v1(48.03,7.21) v1(48.67,12.4) v1(48.62,5.94) v1(48.64,3.07) v1(48.75,43.97) v1(48.72,4.37) v1(48.9,10.44) v1(49.76,8.18) v1(50.12,31.39) v1(50.12,25.63) v1(50.37,27.89) v1(50.6,20.6) v1(50.57,19.08) v1(51.51,8.31) v1(51.67,40.92) v1(51.62,36.7) v1(51.67,7.19) v1(51.72,4.04) v1(51.87,38.73) v1(52.73,10.31) v1(52.99,25.96) v1(52.96,21.08) v1(52.99,18.62) v1(53.01,30.84) v1(53.34,44.17) v1(53.88,41.5) v1(53.85,13.49) v1(54,37.85) v1(54.1,16.21) v1(54.59,8) v1(54.87,22.63) v1(54.82,10.64) v1(54.82,6.58) v1(54.97,4.01) v1(55.17,17.3) v1(55.76,13.54) v1(56.31,31.27) v1(56.31,28.83) v1(56.67,26.16) v1(56.87,37.44) v1(57.71,22.66) v1(57.76,13.46) v1(57.86,18.8) v1(58.73,13.41) v1(59.46,4.37) v1(59.54,37.03) v1(60.84,20.47) v1(60.86,16.76) v1(60.81,15.52) v1(62.92,16.74) v1(62.94,15.52) v1(63.58,13.39) v1(63.86,26.87) v1(64.32,22.96) v1(66.65,22.07) v1(66.91,26.19) v1(66.83,20.07) v1(66.86,14.6) v1(67.39,15.44) v1(67.36,12.32) v1(67.36,9.09) v1(68.38,26.97)
VIN: length 46.9
  TOP w0.381: Q7.2 64.14,8.83 R122.1 64.14,10.19 v1(64.42,10.46) ; 55.22,35.81 55.24,35.83 55.24,46.23 54.85,46.62 54.37,46.62 54.36,46.61 54.1,46.61 54.03,46.54 R126.2 54,46.57 v1(53.27,46.57) 52.4,46.57 LED10.1 ; LED11.1 v1(25.44,46.57)
  TOP w0.61: J4.B9 v1(60.45,30.24)
  BOTTOM w0.381: v1(25.44,46.57) v1(53.27,46.57)
  vias: v1(59.06,35.08) v1(59.57,35.08) v1(60.07,35.08) v1(60.58,35.08) v1(66.28,2.88) v1(66.78,2.87) v1(67.29,2.84) v1(67.8,2.84)
CM4_1V8: length 1.9
  BOTTOM w0.203: U3.90 24.07,10.48 24.18,10.59 24.34,10.59 24.47,10.46 U3.88
CM4_3V3: length 82.3
  TOP w0.508: v1(24.06,28.52) 24.04,28.54 FB1.1 22.6,20.48 v1(24.09,18.99) R5.1 ; R117.1 v1(57.66,24.38)
  PWR03 w0.508: v1(43.47,35.79) 27.36,35.79 24.06,32.49 v1(24.06,28.52)
  BOTTOM w0.203: U3.84 25.27,10.52 25.1,10.69 24.87,10.46 U3.86
  BOTTOM w0.508: v1(57.66,24.38) 47.88,24.38 43.47,28.8 v1(43.47,35.79) R78.1 ; 25.1,10.69 25.5,11.09 R57.2 25.5,17.58 24.9,18.18 24.9,18.18 v1(24.09,18.99)
DCDC_3V3: length 78.2
  TOP w0.203: v1(24.39,19.69) 25.06,19.01 C16.1 25.53,18.44 25.54,18.44 R6.1
  TOP w0.254: U29.19 60.08,18.88 60.07,18.88 60.07,19.31 60.08,19.32 C252.2
  TOP w0.508: v1(46.89,15.43) 47.17,15.15 FB6.1 49.02,15.15 49.02,15.15 C49.1 49.66,15.15 C47.1 49.66,16.77 49.66,16.77 U8.1 ; 52.94,16.56 54.54,18.16 U30.3 56.81,18.63 C254.1 57.6,20.47 59.47,20.47 60.08,19.85 C252.2 ; 52.94,16.56 R89.1 ; 52.94,16.56 v1(52.94,16.56) ; C14.1 18.97,6.43 19.48,5.92 29.75,5.92 30.46,6.63 30.46,9.63 30.92,10.09 Q11.2 32.07,11.4 R136.1 v1(31.47,11.84)
  BOTTOM w0.203: v1(19,12.09) 20.78,13.87 20.78,18.87 21.59,19.69 v1(24.39,19.69)
  BOTTOM w0.508: v1(31.47,11.84) 31.47,13.84 33.05,15.42 41.67,15.42 41.68,15.43 42.32,15.43 42.85,15.43 42.85,15.43 v1(46.89,15.43) 47.53,15.43 47.92,15.82 52.2,15.82 v1(52.94,16.56)
DN: length 11.4
  TOP w0.142: J4.B7 63.51,31.89 63.71,32.08 63.71,32.72 63.53,32.89 J4.A7 61.87,32.89 61.85,32.88 U24.7 U24.4 54.95,32.88 54.82,33.01 L4.4
DP: length 10.4
  TOP w0.142: J4.A6 61.77,32.39 v1(61.76,32.4) 61.11,32.4 61.09,32.38 U24.6 U24.5 55.03,32.38 54.82,32.16 L4.1 ; J4.B6 v1(61.76,33.39)
  BOTTOM w0.142: v1(61.76,33.39) v1(61.76,32.4)
ETH1_LEDG: length 15.9
  TOP w0.127: v1(42.56,6.52) 42.87,6.2 43.2,6.2 43.2,6.2 45.82,6.2 46.76,5.26 46.76,4.11 47.27,3.61 49.68,3.61 v1(50.17,3.12)
  BOTTOM w0.127: U3.15 38.87,7.14 38.96,7.24 41.83,7.24 42.24,6.83 42.25,6.83 v1(42.56,6.52) ; J26.188 50.17,3.12 v1(50.17,3.12)
ETH1_LEDY: length 18.1
  TOP w0.127: v1(42.57,7.19) 43.31,6.45 45.93,6.45 47.02,5.36 47.02,4.22 47.37,3.86 50.96,3.86 v1(51.68,3.15)
  BOTTOM w0.127: v1(42.57,7.19) 42.24,7.52 38.71,7.52 38.47,7.27 U3.17 ; J26.194 v1(51.68,3.15)
ETH1_MDIN0: length 17.4
  BOTTOM w0.114: J26.184 49.17,2.73 49.28,2.84 49.28,4.51 49.17,4.63 U21.5 U21.6 49.17,6.6 49.28,6.71 49.28,7.51 48.77,8.03 40.29,8.03 39.74,8.58 39.74,9.12 39.67,9.19 U3.12
ETH1_MDIN1: length 17.9
  BOTTOM w0.114: J26.190 50.68,2.73 50.78,2.84 50.78,4.51 50.67,4.63 U21.2 U21.9 50.67,6.6 50.78,6.71 50.78,8.22 50.22,8.79 41.25,8.79 40.87,9.17 U3.6
ETH1_MDIN2: length 24.9
  TOP w0.114: v1(52,7.91) 52.28,7.62 52.28,5.95 51.58,5.25 51.11,5.25 51,5.36 51,5.4 50.88,5.51 50.65,5.51 50.54,5.4 50.54,5.36 50.43,5.25 50.2,5.25 50.08,5.36 50.08,5.4 49.97,5.51 49.74,5.51 49.63,5.4 49.63,5.36 49.51,5.25 49.28,5.25 49.17,5.36 49.17,5.4 49.05,5.51 48.83,5.51 48.71,5.4 48.71,5.36 48.6,5.25 48.36,5.25 v1(48.07,5.53)
  BOTTOM w0.114: v1(52,7.91) 52.28,7.62 52.28,6.74 52.16,6.62 U22.6 U22.5 52.16,4.65 52.28,4.54 52.28,4.27 52.29,4.26 52.29,2.85 52.17,2.73 J26.196 ; U3.9 40.07,6.12 40,6.05 40,5.14 40.38,4.76 43.04,4.76 44.15,5.87 46.43,5.87 47.05,5.25 47.79,5.25 v1(48.07,5.53)
ETH1_MDIN3: length 23.9
  TOP w0.114: v1(47.32,6.14) 47.6,6.43 50.13,6.43 50.64,6.94 50.64,8.27 51.12,8.75 53.41,8.75 53.78,8.38 53.78,7.59 v1(53.5,7.3)
  BOTTOM w0.114: J26.202 53.68,2.73 53.78,2.84 53.78,4.54 53.66,4.65 U22.2 U22.9 53.66,6.62 53.78,6.74 53.78,7.02 v1(53.5,7.3) ; v1(47.32,6.14) 47.04,6.43 43.81,6.43 42.75,5.36 41.23,5.36 40.94,5.65 40.94,6.05 40.87,6.12 U3.5
ETH1_MDIP0: length 17.4
  BOTTOM w0.114: J26.186 49.68,2.73 49.55,2.86 49.55,4.51 49.67,4.63 U21.4 U21.7 49.67,6.6 49.55,6.71 49.55,7.62 48.88,8.29 40.4,8.29 40.01,8.69 40.01,9.13 40.07,9.19 U3.10
ETH1_MDIP1: length 17.8
  BOTTOM w0.114: J26.192 51.17,2.73 51.05,2.86 51.05,4.51 51.17,4.63 U21.1 U21.10 51.17,6.6 51.05,6.71 51.05,8.33 50.33,9.06 41.39,9.06 41.27,9.17 U3.4
ETH1_MDIP2: length 25
  TOP w0.114: v1(48.07,4.7) 48.36,4.98 51.69,4.98 52.55,5.84 52.55,7.62 v1(52.83,7.91)
  BOTTOM w0.114: v1(48.07,4.7) 47.79,4.98 46.94,4.98 46.32,5.6 44.26,5.6 43.15,4.5 40.27,4.5 39.73,5.03 39.73,6.05 39.67,6.12 U3.11 ; J26.198 52.68,2.73 52.56,2.85 52.56,4.37 52.55,4.38 52.55,4.54 52.66,4.65 U22.4 U22.7 52.66,6.62 52.55,6.74 52.55,7.62 v1(52.83,7.91)
ETH1_MDIP3: length 23.9
  TOP w0.114: v1(54.33,7.3) 54.05,7.59 54.05,8.49 53.52,9.02 51.01,9.02 50.37,8.38 50.37,7.05 50.02,6.69 47.6,6.69 v1(47.32,6.97)
  BOTTOM w0.114: J26.204 54.17,2.73 54.05,2.86 54.05,4.54 54.16,4.65 U22.1 U22.10 54.16,6.62 54.05,6.74 54.05,7.02 v1(54.33,7.3) ; v1(47.32,6.97) 47.04,6.69 43.7,6.69 42.64,5.63 41.34,5.63 41.2,5.77 41.2,6.05 41.23,6.08 41.23,6.39 41.27,6.43 U3.3
FAN_PWM: length 13.7
  TOP w0.127: U29.4 v1(61.08,13.52)
  BOTTOM w0.127: v1(61.08,13.52) 61.83,12.77 61.83,4.17 60.68,3.01 J26.230
FAN_TACH: length 21
  TOP w0.127: U29.5 61.58,13.71 61.86,13.42 62.83,13.42 63.13,13.11 63.13,12.38 62.44,11.68 v1(61.37,11.68)
  BOTTOM w0.127: v1(61.37,11.68) 61.37,4.17 60.51,3.3 55.53,3.3 55.17,2.95 J26.208
FORCE_OFF: length 85.5
  TOP w0.127: v1(63.15,11.28) 62.13,10.26 62.13,6.32 R131.1 ; Q10.1 21.54,44.79 21.56,44.78 R129.2 v1(22.45,45.32)
  BOTTOM w0.127: v1(63.15,11.28) 65.15,13.28 65.15,44.22 64.06,45.32 v1(22.45,45.32)
GPIO8: length 22.2
  TOP w0.127: v1(35.66,13.31) 35.66,12.87 35.94,12.59 35.94,8.84 v1(35.36,8.26) ; R123.1 v1(48.67,14.08)
  BOTTOM w0.127: v1(48.67,14.08) 48.67,14.08 48.5,13.92 37.01,13.92 36.4,13.31 v1(35.66,13.31) ; U3.39 34.07,7.65 34.67,8.26 v1(35.36,8.26)
GPIO10: length 4.5
  TOP w0.127: Q11.1 33.84,10.89 33.84,10.89 v1(33.84,11.04) 33.84,11.42 R136.2 33.43,12.28 33.44,12.29 R137.2
  BOTTOM w0.127: v1(33.84,11.04) 33.27,10.47 U3.44
GPIO12: length 38.1
  TOP w0.127: v1(61.72,19.35) 61.28,19.35 61.08,19.15 U29.17 ; v1(36.22,8) v1(36.22,13.87)
  BOTTOM w0.127: v1(36.22,8) 35.67,7.45 U3.31 ; v1(36.22,13.87) 36.55,14.19 48.09,14.19 48.45,14.55 56.62,14.55 60.12,18.06 61.67,18.06 62.02,18.41 62.02,19.06 v1(61.72,19.35)
GPIO14: length 70.3
  TOP w0.127: U29.20 v1(58.3,16.9) ; v1(34.57,13.11) 34.95,12.73 34.95,9.63 34.52,9.19 31.5,9.19 30.97,8.66 v1(30.97,5.77) 30.38,5.18 6.68,5.18 5.49,6.38 5.49,10.11 J28.2
  BOTTOM w0.127: U3.55 30.87,5.86 v1(30.97,5.77) ; v1(58.3,16.9) 56.2,14.81 48.35,14.81 48,14.47 35.92,14.47 v1(34.57,13.11)
GPIO15: length 71.5
  TOP w0.127: J28.1 5.13,7.92 5.13,6.17 6.43,4.88 30.83,4.88 v1(31.67,5.72) 31.67,8.42 32.18,8.94 34.63,8.94 35.21,9.52 35.21,13.26 v1(34.65,13.82) ; U29.18 60.58,18.63 v1(60.61,18.67)
  BOTTOM w0.127: U3.51 v1(31.67,5.72) ; v1(60.61,18.67) 59.43,18.67 55.82,15.06 48.24,15.06 47.9,14.72 35.55,14.72 v1(34.65,13.82)
GPIO17: length 36.6
  TOP w0.127: U29.16 v1(61.58,18.69)
  BOTTOM w0.127: U3.50 32.07,13.68 33.37,14.97 41.85,14.97 41.86,14.99 42.14,14.99 43.03,14.99 43.03,14.99 47.81,14.99 48.14,15.32 55.7,15.32 59.51,19.13 61.14,19.13 v1(61.58,18.69)
GPIO_VREF: length 2
  BOTTOM w0.127: R57.1 26.42,11.32 26.47,11.28 U3.78
